# EAGLE board Board Laurien (EAGLE 5.12)
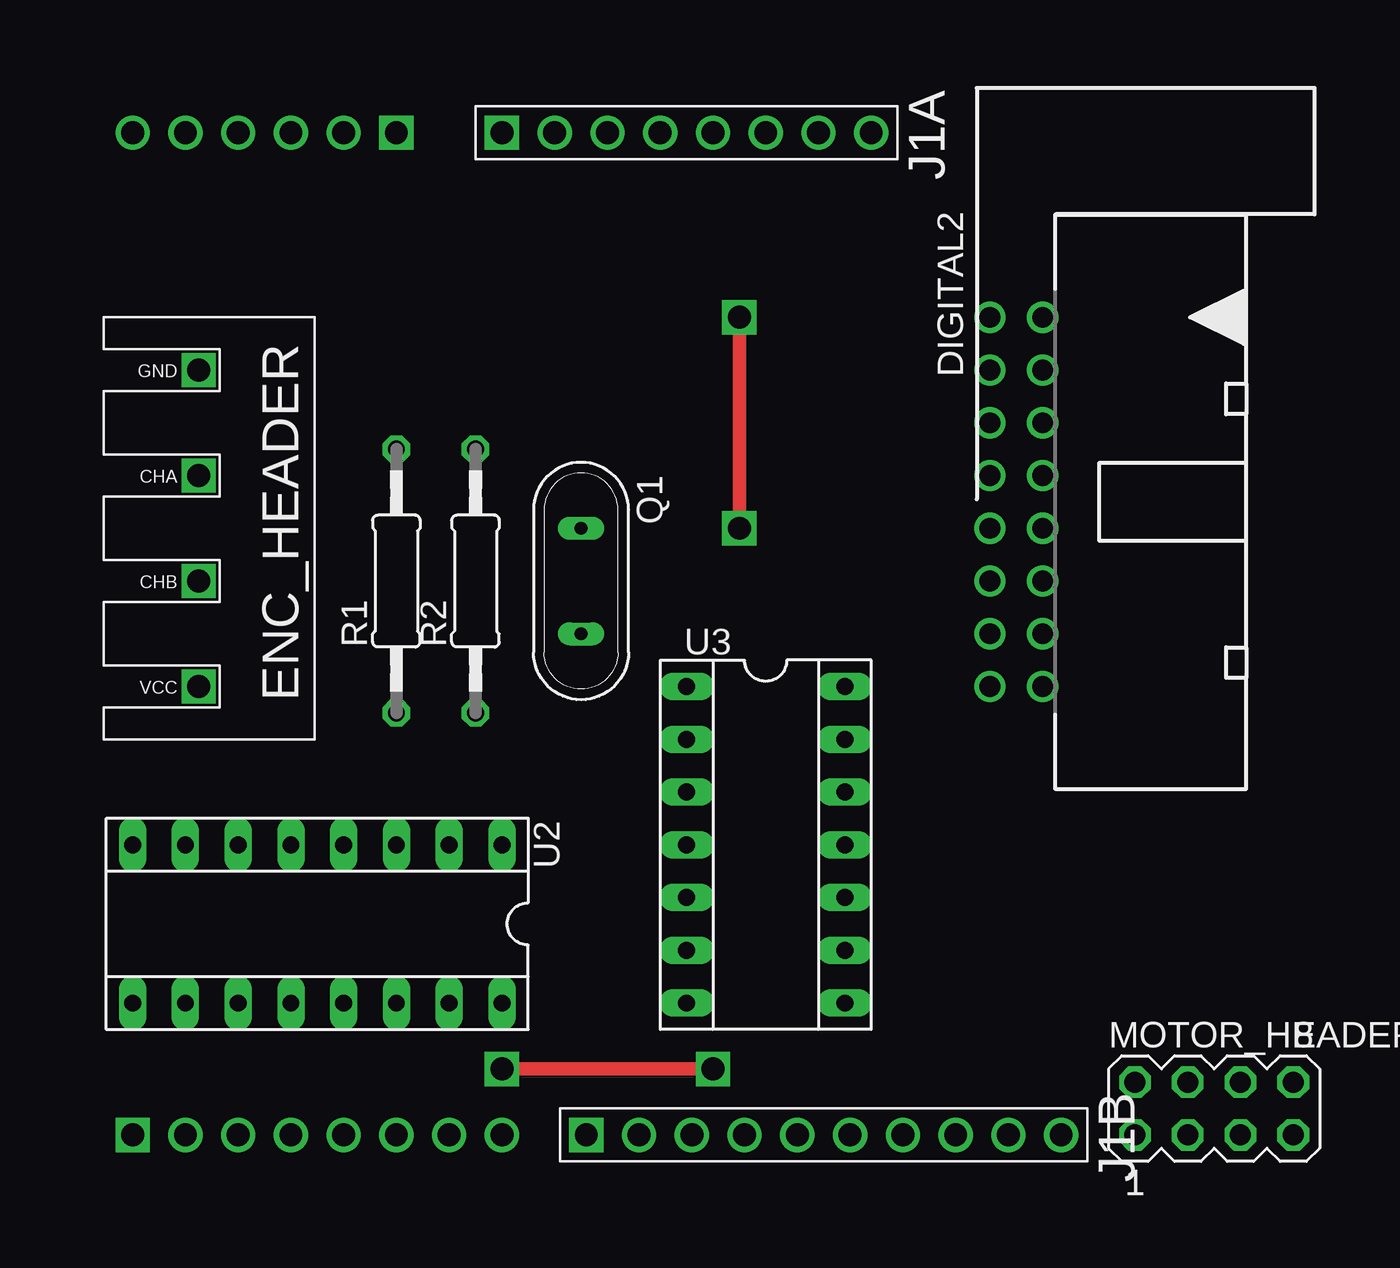
[diagram p0: board, top side]
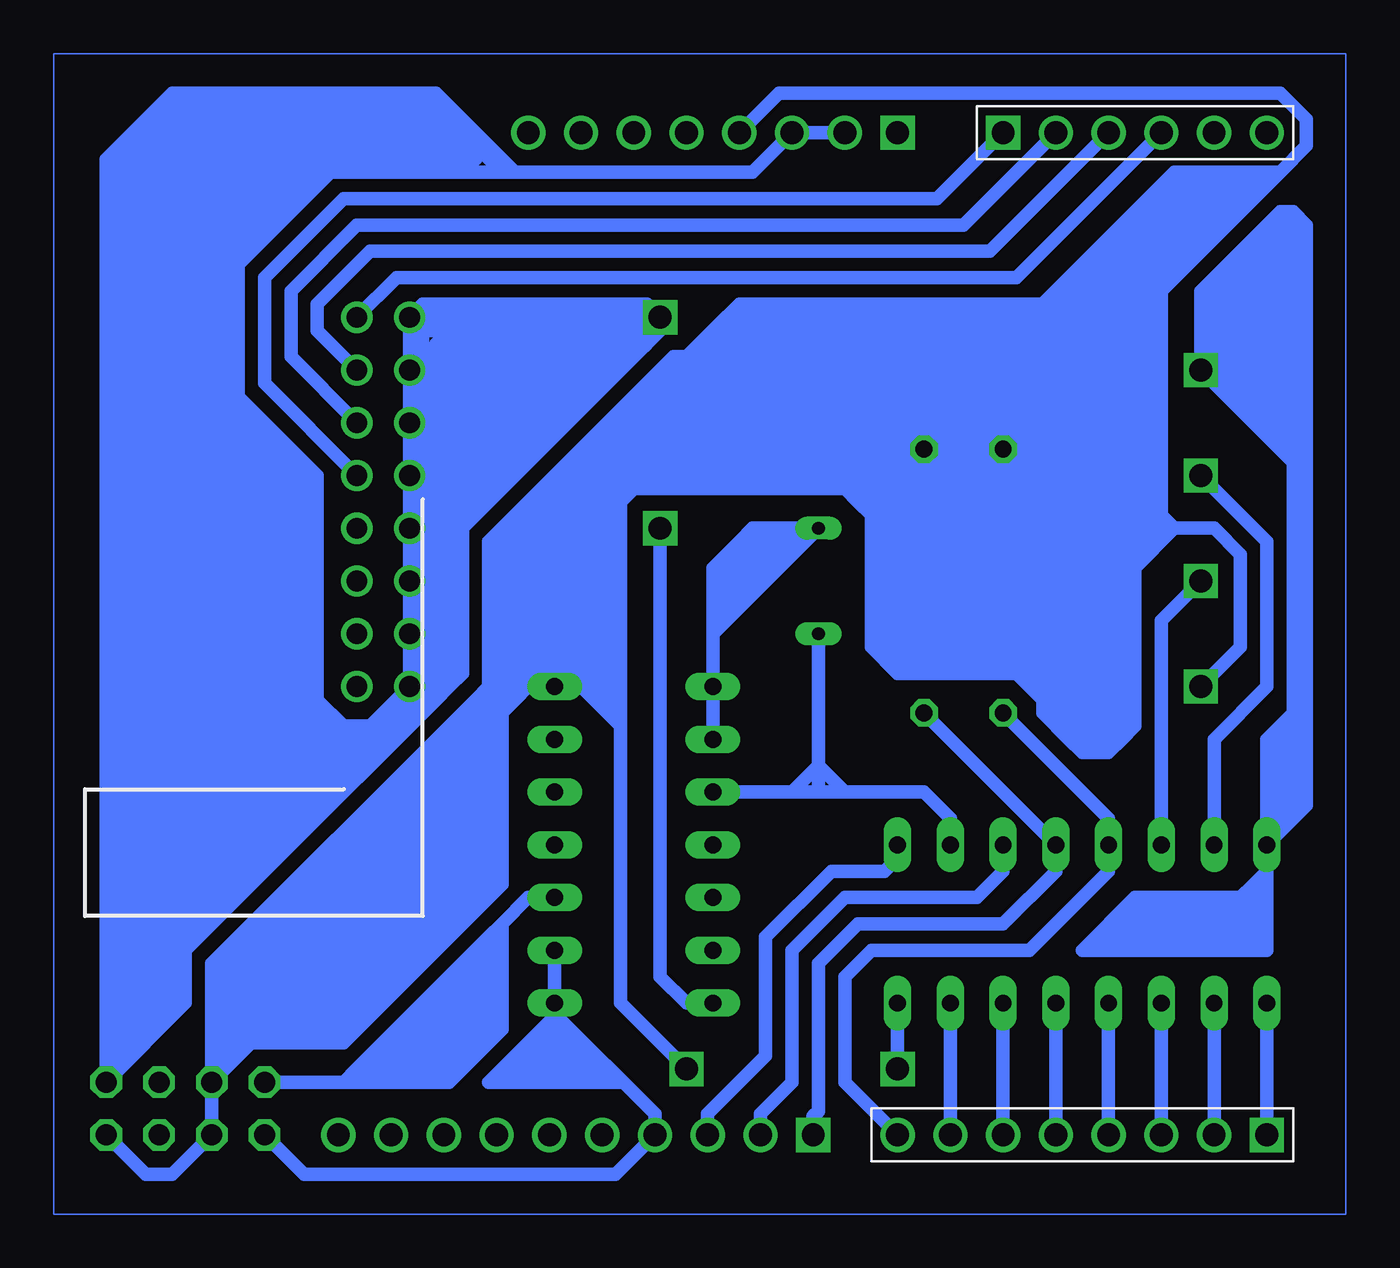
[diagram p1: board, bottom side, seen from below]

No outline drawn. Coordinates in mm, seen from the top.
Copper layers (1*16): Top 0.035mm / dielectric 1.5mm / Bottom 0.035mm
Design rules "default": minimum track width 10mil, minimum drill 24mil, track to track 8mil, track to pad 8mil, pad to pad 8mil, via to via 8mil, smd to smd 8mil, copper to edge 40mil, drill to drill 8mil, minimum pad ring 10mil, minimum via ring 8mil, stop-mask expansion 4mil, vias tented up to drill 0mil, thermal gap 10mil

## Footprints (pad centres in the part's own frame; a part is rotated, then mirrored left to right if it is on the bottom)
PAK100/2500-5-16 = drill 1 pad 1.422 round: 1 -8.89,-1.27; 2 -8.89,1.27; 3 -6.35,-1.27; 4 -6.35,1.27; 5 -3.81,-1.27; 6 -3.81,1.27; 7 -1.27,-1.27; 8 -1.27,1.27; 9 1.27,-1.27; 10 1.27,1.27; 11 3.81,-1.27; 12 3.81,1.27; 13 6.35,-1.27; 14 6.35,1.27; 15 8.89,-1.27; 16 8.89,1.27
MA04-2 = drill 1.016 octagon: 1 -3.81,-1.27; 2 -3.81,1.27; 3 -1.27,-1.27; 4 -1.27,1.27; 5 1.27,-1.27; 6 1.27,1.27; 7 3.81,-1.27; 8 3.81,1.27
QS = drill 0.61 long: 1 -2.54,0; 2 2.54,0
0207/12 = drill 0.813 octagon: 1 -6.35,0; 2 6.35,0
SOCKET-16 = drill 0.813 long: 1 -8.89,-3.81; 2 -6.35,-3.81; 3 -3.81,-3.81; 4 -1.27,-3.81; 5 1.27,-3.81; 6 3.81,-3.81; 7 6.35,-3.81; 8 8.89,-3.81; 9 8.89,3.81; 10 6.35,3.81; 11 3.81,3.81; 12 1.27,3.81; 13 -1.27,3.81; 14 -3.81,3.81; 15 -6.35,3.81; 16 -8.89,3.81
SOCKET-14 = drill 0.813 long: 1 -7.62,-3.81; 2 -5.08,-3.81; 3 -2.54,-3.81; 4 0,-3.81; 5 2.54,-3.81; 6 5.08,-3.81; 7 7.62,-3.81; 8 7.62,3.81; 9 5.08,3.81; 10 2.54,3.81; 11 0,3.81; 12 -2.54,3.81; 13 -5.08,3.81; 14 -7.62,3.81

## Placement (x,y rotation side)
DIGITAL2  [PAK100/2500-5-16]  46.35,34.29 270 top
MOTOR_HEADER  [MA04-2]  55.88,5.08 0 top
Q1  [QS]  25.4,30.48 270 top
R1  [0207/12]  16.51,30.48 90 top
R2  [0207/12]  20.32,30.48 90 top
U2  [SOCKET-16]  12.7,13.97 180 top
U3  [SOCKET-14]  34.29,17.78 270 top

## Library data of the parts
DIGITAL2 = con-3m
MOTOR_HEADER = con-lstb
Q1 = special
R1 R2 = rcl
U2 U3 = ic-package

## Nets
S$1: U2.7
S$2: Q1.1 U3.1 U3.2
S$4: U2.8 U3.7
S$6: U2.6
S$7: MOTOR_HEADER.3 MOTOR_HEADER.4 MOTOR_HEADER.7 R1.2 R2.2 U2.16 U3.14
S$8: R2.1 U2.4
S$10: DIGITAL2.6
S$12: MOTOR_HEADER.2 U3.10
S$15: MOTOR_HEADER.1 U3.8 U3.9
S$22: R1.1 U2.5
S$24: Q1.2 U2.2 U3.3
S$25: DIGITAL2.2
S$40: DIGITAL2.1 DIGITAL2.3 DIGITAL2.5 DIGITAL2.7 DIGITAL2.9 DIGITAL2.11 DIGITAL2.13 DIGITAL2.15 MOTOR_HEADER.8
S$44: U2.15
S$47: DIGITAL2.4
S$49: DIGITAL2.8
S$53: U2.1
S$54: U2.3
S$56: U2.14
S$57: U2.10
S$58: U2.11
S$59: U2.12
S$60: U2.13
S$61: U2.9

## Tracks (layer width: path | path; a pad name or v marks a point on that pad's centre or on a via)
S$1  (via drill 1.1)
  Bottom 0.66: U2.7 6.35,22.86 3.81,25.4 3.81,32.38 v6.99,35.56
S$2
  Bottom 0.66: U3.2 U3.1 | U3.1 30.48,27.94 26.04,32.38 | 26.04,32.38 Q1.1 28.57,33.02 29.21,32.38 | U3.1 30.48,28.57 | 30.48,29.84 30.48,31.11 | 26.04,32.38 26.67,32.38 | 26.67,32.38 29.21,32.38 | 29.21,32.38 30.48,31.11 | 30.48,31.11 29.84,31.11 | 29.84,31.11 29.21,31.75 28.57,31.75 | 28.57,31.75 27.3,31.75 | 27.3,31.75 26.67,32.38 | 27.3,31.75 27.94,31.11 | 27.94,31.11 30.48,28.57 | 30.48,28.57 30.48,29.21 | 30.48,29.21 30.48,29.84 | 30.48,29.84 28.57,31.75 | 28.57,31.75 27.94,31.11 | 27.94,31.11 28.57,31.11 29.84,29.84 | 29.84,31.11 29.84,29.84 | 29.84,29.84 30.48,29.21
S$3
  Bottom 0.66: 55.88,53.34 56.52,53.34 59.05,50.8 58.42,50.8 | 57.78,50.8 57.15,50.8 | 57.15,50.8 56.52,50.8 56.52,51.44 | 56.52,52.07 56.52,52.7 58.42,50.8 | 58.42,50.8 57.78,50.8 | 57.78,50.8 56.52,52.07 | 56.52,52.07 56.52,51.44 | 56.52,51.44 57.15,50.8
S$4  (via drill 1.1)
  Top 0.66: v33.02,33.02 v33.02,43.18
  Bottom 0.66: U3.7 31.75,10.16 33.02,11.43 v33.02,33.02 | 4.45,42.55 5.08,42.55 | 3.81,43.18 4.45,42.55 | 3.17,43.81 3.81,43.18 | 3.17,44.45 3.17,43.81 | 3.17,44.45 5.08,42.55 | 5.08,42.55 5.08,43.18 3.17,45.09 | 3.17,45.09 3.17,44.45 | 3.17,42.55 3.17,43.81 | 3.17,42.55 3.81,43.18 | 4.45,42.55 3.81,42.55 3.17,41.91 | 5.08,42.55 4.45,41.91 3.17,41.91 | 3.17,41.91 3.17,42.55 | 3.17,40.64 3.17,41.91 | 3.17,45.72 3.17,45.09 | 3.17,46.35 3.17,45.72 | 3.17,46.99 3.17,46.35 | 3.17,46.99 5.71,44.45 5.71,43.81 | 5.08,43.81 3.17,45.72 | 5.71,43.81 3.17,46.35 | 5.71,43.81 5.08,43.81 | 3.81,41.27 3.17,40.64 | 3.81,41.27 3.17,41.91 | 3.17,40.01 3.17,40.64 | 4.45,41.27 3.17,40.01 | 4.45,41.27 3.81,41.27 | 5.71,43.18 5.71,43.81 | 5.71,43.18 5.08,43.81 | 2.54,47.62 3.17,46.99 | 4.45,40.64 4.45,41.27 | 2.54,39.37 3.17,40.01 | 2.54,39.37 2.54,47.62 | 2.54,38.73 2.54,39.37 | 2.54,38.73 4.45,40.64 | 4.45,40.64 5.08,41.27 5.71,41.27 1.91,37.47 | 2.54,47.62 3.17,47.62 6.35,44.45 6.35,41.27 | 5.71,42.55 5.71,43.18 | 5.08,41.91 4.45,41.27 | 5.08,41.91 5.71,42.55 | 5.71,41.91 5.08,41.91 | 5.71,41.91 5.71,42.55 | 1.91,38.1 1.91,47.62 2.54,48.26 3.17,48.26 6.99,44.45 6.99,43.18 | 1.91,38.1 2.54,38.73 | 1.91,37.47 1.91,38.1 | 6.35,41.27 5.71,41.91 | 6.99,43.18 6.35,43.81 | 6.99,41.27 v6.99,40.64 2.54,36.2 2.54,24.13 | 6.99,41.27 6.99,43.18 | 6.99,41.27 6.35,41.27 | 1.91,36.83 6.35,41.27 | 1.91,36.83 1.91,37.47 | 1.91,36.2 1.91,36.83 | 1.91,36.2 6.99,41.27 | 2.54,24.13 2.54,19.68 3.17,19.05 3.17,23.5 | 3.17,23.5 2.54,24.13 | 1.91,24.77 1.91,36.2 | 1.91,24.77 2.54,24.13 | 1.91,24.77 1.91,19.68 U2.8 3.81,22.86 3.17,23.5
S$5
  Bottom 0.66: 3.81,13.97 3.81,12.7 4.45,12.7 | 4.45,12.7 11.43,12.7 | 12.06,12.7 12.7,12.7 10.16,15.24 5.08,15.24 | 5.08,15.24 4.45,15.88 | 4.45,15.88 3.81,16.51 3.81,15.24 | 3.81,15.24 5.08,15.24 | 5.08,15.24 4.45,14.61 | 4.45,14.61 3.81,13.97 | 3.81,14.61 3.81,15.24 | 3.81,15.24 4.45,15.88 | 4.45,15.88 4.45,15.24 3.81,14.61 | 3.81,14.61 3.81,13.97 | 3.81,13.97 4.45,13.34 | 4.45,13.34 4.45,12.7 | 4.45,13.34 4.45,13.97 5.08,13.97 | 5.08,13.97 5.71,14.61 | 5.71,14.61 4.45,14.61 | 5.71,14.61 10.16,14.61 11.43,13.34 | 11.43,13.34 12.06,12.7 | 12.06,12.7 11.43,12.7 | 11.43,12.7 10.16,13.97 5.08,13.97 | 5.08,13.97 4.45,13.34 | 4.45,13.34 11.43,13.34
S$6  (via drill 1.1)
  Bottom 0.66: v6.99,30.48 8.89,28.57 U2.6
S$7  (via drill 1.1)
  Top 0.66: v21.59,6.99 v31.75,6.99
  Bottom 0.66: v29.21,52.07 27.3,53.98 3.17,53.98 1.91,52.7 1.91,51.44 3.17,50.16 | 3.17,50.16 3.81,50.16 | 3.81,50.16 8.26,50.16 15.24,43.18 | 15.88,42.55 20.32,38.1 20.32,37.47 | 10.16,29.84 10.16,30.48 | 10.16,24.77 10.16,29.84 | 10.16,24.13 10.16,23.5 10.79,22.86 | 10.79,22.86 11.43,22.23 12.7,22.23 13.34,22.86 | 13.34,22.86 14.61,24.13 14.61,24.77 | 14.61,24.77 15.88,26.04 | 15.88,26.04 21.59,26.04 22.86,27.3 22.86,33.66 | v6.99,25.4 5.08,27.3 5.08,31.75 6.35,33.02 8.26,33.02 | 8.89,33.02 8.26,33.02 | 9.53,33.02 12.7,33.02 R1.2 17.14,36.83 | 8.26,33.02 10.16,31.11 | 22.86,33.66 22.86,34.29 R2.2 | 17.14,36.83 19.68,36.83 | 19.68,36.83 R2.2 | 12.7,32.38 17.14,36.83 | 10.79,30.48 12.7,32.38 | 10.16,30.48 10.79,30.48 | 10.16,30.48 10.16,31.75 | 10.16,31.75 8.89,33.02 | 8.89,33.02 9.53,33.02 | 10.16,32.38 9.53,33.02 | 10.79,31.75 10.16,32.38 | 11.43,32.38 10.16,32.38 | 11.43,32.38 12.06,32.38 | 12.7,32.38 12.06,32.38 | 12.06,32.38 10.79,31.11 10.16,31.75 | 10.16,31.75 10.79,31.75 | 11.43,32.38 10.79,31.75 | 11.43,32.38 11.43,31.75 10.16,30.48 | 10.16,29.84 10.79,30.48 | 13.34,22.86 10.79,22.86 | 13.34,23.5 13.34,22.86 | 13.97,24.13 14.61,24.77 | 13.34,24.77 14.61,24.77 | 13.34,24.77 12.7,24.77 | 12.06,24.77 12.7,24.77 | 11.43,24.77 12.06,24.77 | 10.79,24.77 11.43,24.77 | 10.16,24.77 10.16,24.13 | 10.16,24.13 10.79,23.5 12.06,23.5 | 12.7,23.5 13.34,23.5 | 13.34,23.5 13.97,24.13 | 13.34,24.77 13.97,24.13 | 13.34,24.13 13.34,24.77 | 13.34,24.13 12.7,24.77 | 12.7,24.77 12.7,24.13 12.06,24.77 | 12.06,24.77 12.06,24.13 | 11.43,24.77 12.06,24.13 | 11.43,24.77 11.43,24.13 10.79,24.13 10.16,24.77 | 10.79,24.77 10.16,24.77 | 12.06,23.5 10.79,24.77 | 12.06,23.5 12.7,23.5
  Bottom 0.66: 12.7,23.5 13.34,24.13 | 13.34,24.13 12.06,24.13 | 15.24,26.04 13.97,26.04 | 15.88,26.04 15.24,26.04 | 15.24,26.04 14.61,25.4 | 20.32,37.47 R2.2 | 3.17,50.16 6.35,46.99 | 6.35,46.99 6.99,46.99 | 7.62,46.99 8.26,46.99 8.89,46.35 | 8.89,46.35 12.7,42.55 | 8.89,46.35 8.89,45.72 | 8.89,45.72 8.89,44.45 | 8.89,44.45 8.89,33.66 8.26,33.02 | 3.81,50.16 4.45,49.53 | 4.45,49.53 6.35,47.62 8.26,47.62 8.26,48.26 | 8.26,48.9 8.26,49.53 | 8.26,49.53 7.62,49.53 | 7.62,49.53 6.35,49.53 | 5.08,49.53 5.71,48.9 | 5.71,48.9 6.35,48.26 7.62,48.26 | 7.62,48.9 7.62,49.53 | 5.08,49.53 4.45,49.53 | 5.08,49.53 6.35,49.53 | 6.35,49.53 6.99,48.9 | 6.99,48.9 5.71,48.9 | 6.99,48.9 7.62,48.9 | 7.62,48.9 7.62,48.26 | 8.26,49.53 13.97,43.81 | 13.97,43.81 20.32,37.47 | 20.32,37.47 19.68,37.47 8.26,48.9 | 8.26,48.9 8.26,48.26 | 8.26,48.26 19.68,36.83 | 7.62,48.26 17.14,38.73 | 22.86,33.66 23.5,34.29 | 6.35,46.99 8.89,44.45 | 9.53,44.45 6.99,46.99 | 6.99,46.99 7.62,46.99 | 7.62,46.99 8.89,45.72 | 41.91,24.77 41.27,25.4 41.27,26.04 | 41.91,24.77 42.55,24.13 | 42.55,24.13 54.61,12.06 54.61,8.26 | v21.59,6.99 U2.16 | v31.75,6.99 34.92,10.16 34.92,23.5 | 34.92,23.5 36.83,25.4 U3.14 | 39.37,27.94 38.1,26.67 38.1,26.04 | U3.14 38.1,26.04 | 39.37,25.4 U3.14 | 40.01,24.77 39.37,25.4 | 40.64,16.51 40.64,15.88 48.26,8.26 | 40.64,16.51 40.64,17.14 | 40.64,17.14 40.64,24.13 | MOTOR_HEADER.7 57.78,1.91 56.52,1.91 MOTOR_HEADER.3 MOTOR_HEADER.4 | 48.26,8.26 52.07,8.26 | MOTOR_HEADER.4 53.98,6.99 | 53.98,6.99 53.34,7.62 | 53.34,7.62 52.7,8.26 | 52.7,8.26 52.07,8.26 | 52.07,8.26 43.81,16.51 43.81,17.78 | 43.81,19.05 43.81,19.68 43.18,20.32 | 54.61,8.26 54.61,7.62 | 54.61,7.62 MOTOR_HEADER.4 | 52.7,8.26 53.98,8.26
  Bottom 0.66: 54.61,8.26 53.98,8.26 | 53.98,8.26 53.34,7.62 | 53.34,7.62 54.61,7.62 | 54.61,7.62 53.98,6.99 | 48.26,8.26 48.26,8.89 40.64,16.51 | 40.64,16.51 41.27,16.51 | 41.27,16.51 48.26,9.53 48.26,10.16 41.91,16.51 42.55,16.51 48.26,10.79 48.26,11.43 43.18,16.51 44.45,16.51 48.9,12.06 48.9,12.7 | 48.9,12.7 45.09,16.51 | 48.9,12.7 49.53,12.06 53.98,12.06 53.34,12.7 | 53.34,12.7 45.72,20.32 | 45.72,20.32 41.91,24.13 | 45.72,20.32 45.72,19.68 | 45.72,19.68 45.72,19.05 | 45.72,18.41 45.72,17.78 | 50.16,12.7 50.8,12.7 | 51.44,12.7 52.07,12.7 | 53.34,12.7 52.7,12.7 | 45.72,19.68 52.7,12.7 | 52.7,12.7 52.07,12.7 | 52.07,12.7 45.72,19.05 | 45.72,18.41 51.44,12.7 | 51.44,12.7 50.8,12.7 | 50.8,12.7 45.72,17.78 | 45.72,17.78 45.72,17.14 | 45.72,17.14 45.72,16.51 | 45.72,16.51 49.53,12.7 50.16,12.7 | 50.16,12.7 45.72,17.14 | 45.72,16.51 41.27,16.51 | 41.27,16.51 40.64,17.14 | 40.64,17.14 41.27,17.14 | 41.27,17.14 42.55,17.14 | 44.45,17.14 45.09,17.14 | 45.09,17.14 45.72,17.14 | 45.72,18.41 45.72,19.05 | 45.72,19.68 41.27,24.13 41.27,23.5 | 41.27,23.5 41.27,17.14 | 41.27,17.14 41.91,17.78 | 41.91,17.78 41.91,18.41 | 41.91,18.41 41.91,19.05 | 41.91,20.32 41.91,20.95 | 41.91,20.95 41.91,21.59 | 41.91,22.23 41.91,22.86 | 41.91,22.86 41.27,23.5 | 41.91,22.86 45.09,19.68 45.09,19.05 | 45.09,17.14 45.09,19.05 | 45.09,19.05 41.91,22.23 | 41.91,22.23 41.91,21.59 | 41.91,21.59 43.18,20.32 | 43.18,20.32 42.55,20.32 41.91,20.95 | 41.91,20.95 42.55,20.95 44.45,19.05 44.45,17.14 | 44.45,17.14 42.55,17.14 | 42.55,17.14 41.91,17.78 | 41.91,17.78 42.55,17.78 | 43.18,17.78 43.81,17.78 | 43.81,17.78 43.81,19.05 | 43.81,19.05 43.18,19.68 42.55,19.68 | 42.55,19.68 41.91,20.32 | 41.91,20.32 41.91,19.05
  Bottom 0.66: 41.91,19.05 42.55,18.41 | 42.55,18.41 42.55,19.68 | 42.55,19.68 43.18,19.05 43.18,17.78 | 43.18,17.78 42.55,17.78 | 42.55,17.78 41.91,18.41 | 41.91,18.41 42.55,18.41 | 42.55,18.41 43.18,17.78 | 34.92,23.5 34.92,24.13 | 34.92,24.13 34.92,24.77 | 34.92,24.77 34.92,32.38 | 34.92,32.38 34.92,34.29 25.4,43.81 | 41.27,26.04 41.27,26.67 | 41.27,26.67 41.27,27.3 | 41.27,27.94 41.27,28.57 | 41.27,29.21 41.27,32.38 32.38,41.27 31.75,41.27 29.21,43.81 25.4,43.81 | 42.55,24.13 40.64,24.13 | 40.64,24.13 40.01,24.77 | 40.01,24.77 41.27,24.77 | 41.91,24.77 41.27,24.77 | 41.27,24.77 40.64,25.4 | 39.37,25.4 40.64,25.4 | 40.64,25.4 41.27,26.04 | 41.27,26.04 40.64,26.04 | 38.1,26.04 40.64,26.04 | 40.64,26.04 41.27,26.67 | 41.27,26.67 40.64,26.67 | 40.01,26.67 38.73,26.67 | 38.73,26.67 39.37,27.3 | 39.37,27.3 41.27,29.21 | 41.27,29.21 41.27,28.57 | 41.27,28.57 40.01,27.3 40.64,27.3 41.27,27.94 | 41.27,27.94 41.27,27.3 | 41.27,27.3 40.64,26.67 | 40.64,26.67 40.01,26.67 | 40.01,26.67 39.37,27.3 | 38.73,26.67 38.1,26.04 | 34.92,24.13 36.83,26.04 | 36.83,26.04 38.1,26.04 | 36.83,26.04 36.2,26.04 | 36.2,26.04 35.56,26.04 35.56,25.4 | 35.56,25.4 34.92,24.77 | 35.56,25.4 36.2,26.04 | 13.97,43.81 25.4,43.81 | 15.88,43.18 27.94,43.18 | 28.57,43.18 29.21,43.18 | 29.21,43.18 29.84,43.18 40.64,32.38 40.64,31.75 29.21,43.18 | 29.21,43.18 29.21,42.55 | 29.21,42.55 39.37,32.38 | 39.37,32.38 40.01,31.75 35.56,31.75 | 35.56,31.75 34.92,32.38 | 34.92,32.38 38.73,32.38 | 39.37,32.38 38.73,32.38 | 38.73,32.38 38.1,33.02 | 37.47,33.66 36.83,34.29 | 36.83,34.29 27.94,43.18 | 27.94,43.18 28.57,43.18 | 28.57,43.18 29.21,42.55 | 29.21,42.55 27.94,42.55 | 27.3,42.55 15.88,42.55 | 15.88,42.55 15.24,43.18
  Bottom 0.66: 15.24,43.18 15.88,43.18 | 15.88,43.18 17.14,41.91 | 17.14,41.91 18.41,40.64 | 18.41,40.64 20.95,38.1 | 20.95,38.1 20.95,37.47 | 20.95,37.47 20.95,36.83 23.5,34.29 | 23.5,34.29 24.13,34.92 28.57,34.92 | 29.84,34.92 30.48,34.92 | 31.11,34.92 31.75,34.92 | 32.38,34.92 33.02,34.92 | 33.66,34.92 34.29,34.92 35.56,33.66 | 36.2,33.66 37.47,33.66 | 37.47,33.66 38.1,33.02 | 38.1,33.02 35.56,33.02 | 35.56,33.02 35.56,33.66 | 35.56,33.66 35.56,34.29 | 35.56,34.29 35.56,34.92 | 35.56,34.92 36.2,34.29 | 35.56,33.66 36.2,33.66 | 36.2,33.66 36.83,34.29 | 36.83,34.29 35.56,34.29 | 35.56,31.75 35.56,33.02 | 35.56,34.29 27.3,42.55 | 27.3,42.55 27.94,42.55 | 27.94,42.55 35.56,34.92 | 17.14,41.91 17.78,41.91 | 25.4,41.91 26.67,41.91 33.66,34.92 | 33.66,34.92 33.02,34.92 | 33.02,34.92 26.67,41.27 25.4,41.27 | 19.05,41.27 18.41,41.27 17.78,41.91 | 17.78,41.91 25.4,41.91 | 25.4,41.91 32.38,34.92 | 32.38,34.92 31.75,34.92 | 31.75,34.92 25.4,41.27 | 25.4,41.27 19.05,41.27 | 19.05,41.27 18.41,40.64 | 18.41,40.64 19.05,40.64 | 23.5,40.64 24.77,40.64 | 24.77,40.64 25.4,40.64 30.48,35.56 | 30.48,35.56 31.11,34.92 | 31.11,34.92 30.48,34.92 | 30.48,34.92 24.77,40.64 | 24.77,40.64 24.77,40.01 | 24.77,40.01 29.21,35.56 | 29.21,35.56 28.57,35.56 | 28.57,35.56 24.13,40.01 | 24.13,40.01 24.13,39.37 28.57,34.92 | 28.57,34.92 29.84,34.92 | 29.84,34.92 30.48,35.56 | 30.48,35.56 29.21,35.56 | 28.57,35.56 27.3,35.56 | 27.3,35.56 24.13,35.56 | 24.13,35.56 23.5,34.92 20.95,37.47 | 20.95,38.73 19.68,40.01 | 19.68,40.01 19.05,40.64 | 19.05,40.64 23.5,40.64 | 23.5,40.64 24.13,40.01 | 24.13,40.01 22.86,40.01 | 19.68,40.01 20.32,40.01 | 22.23,40.01 22.86,40.01 | 22.86,40.01 26.67,36.2 26.04,36.2 | 25.4,36.2 24.13,36.2
  Bottom 0.66: 24.13,36.2 23.5,35.56 | 20.95,38.73 20.95,39.37 | 20.32,40.01 22.23,40.01 | 22.23,40.01 26.04,36.2 | 26.04,36.2 25.4,36.2 | 25.4,36.2 24.77,36.83 | 24.77,36.83 22.23,39.37 | 22.23,39.37 21.59,39.37 | 21.59,39.37 20.95,39.37 | 20.95,39.37 20.32,40.01 | 20.95,39.37 21.59,38.73 | 24.13,36.2 24.77,36.83 | 24.77,36.83 24.13,36.83 21.59,39.37 | 22.23,39.37 23.5,39.37 24.77,40.64 | 24.77,40.01 24.77,38.1 27.3,35.56 | 24.13,35.56 23.5,35.56 | 23.5,35.56 20.95,38.1 | 20.95,38.1 20.95,38.73 | 20.95,38.73 21.59,38.73 | 21.59,38.73 24.13,36.2 | 24.13,36.2 24.13,35.56 | 24.13,35.56 20.95,38.73
S$8  (via drill 1.1)
  Bottom 0.66: v25.65,3.81 25.65,4.7 25.4,4.95 25.4,12.06 23.5,13.97 16.51,13.97 13.97,16.51 U2.4 R2.1
S$9
  Bottom 0.66: 38.1,9.53 41.27,6.35 40.64,6.35 | 40.01,6.35 39.37,6.35 | 38.73,6.35 37.47,6.35 | 37.47,6.35 36.83,6.35 | 36.2,6.35 35.56,6.35 | 34.92,6.35 35.56,6.35 | 35.56,6.35 38.1,8.89 40.64,6.35 | 40.64,6.35 40.01,6.35 | 40.01,6.35 38.1,8.26 36.2,6.35 | 36.2,6.35 36.83,6.35 | 36.83,6.35 38.1,7.62 39.37,6.35 | 39.37,6.35 38.73,6.35 | 38.73,6.35 38.1,6.99 37.47,6.35
S$10  (via drill 1.1)
  Bottom 0.66: DIGITAL2.6 50.8,41.27 50.8,44.45 47.62,47.62 18.41,47.62 v13.97,52.07
S$11  (via drill 1.1)
  other vias: 35.81,3.81
S$12
  Bottom 0.66: 40.64,13.97 39.37,15.24 U3.10 | 40.64,13.97 41.27,13.34 | 41.27,13.34 47.62,6.99 | 47.62,6.99 48.26,6.35 | MOTOR_HEADER.2 48.26,6.35 | 40.64,13.97 40.64,8.89 43.18,6.35 48.26,6.35 | 41.27,13.34 41.27,12.7 | 41.27,12.7 41.27,8.89 43.18,6.99 46.99,6.99 | 47.62,6.99 46.99,6.99 | 46.99,6.99 46.35,7.62 | 46.35,7.62 41.91,12.06 | 41.27,12.7 41.91,12.06 | 41.91,12.06 41.91,11.43 | 41.91,11.43 41.91,8.89 43.18,7.62 45.72,7.62 | 46.35,7.62 45.72,7.62 | 45.72,7.62 45.09,8.26 | 45.09,8.26 42.55,10.79 | 41.91,11.43 42.55,10.79 | 42.55,10.79 42.55,10.16 | 42.55,10.16 42.55,8.89 43.18,8.26 43.81,8.26 | 43.81,8.26 44.45,8.26 | 45.09,8.26 44.45,8.26 | 44.45,8.26 43.18,9.53 43.18,8.89 43.81,8.26 | 43.81,8.26 43.81,8.89 42.55,10.16
S$14
  Bottom 0.66: 13.34,32.38 15.88,34.92 15.88,34.29 | 15.88,34.29 15.88,33.66 15.24,33.66 15.88,34.29
S$15  (via drill 1.1)
  Bottom 0.66: MOTOR_HEADER.1 50.16,1.91 35.18,1.91 v33.27,3.81 33.27,4.83 38.1,9.65 U3.8 U3.9
S$19
  Bottom 0.66: 20.95,35.56 22.23,34.29 21.59,34.29 | 21.59,34.29 20.95,34.29 20.95,34.92 21.59,34.29
S$20
  Bottom 0.66: 22.23,27.94 22.23,27.3 | 21.59,26.67 22.23,27.3 | 21.59,27.3 22.23,27.3
S$22  (via drill 1.1)
  Bottom 0.66: v21.59,3.81 24.13,6.35 24.13,11.43 22.86,12.7 15.24,12.7 11.43,16.51 U2.5 11.43,19.05 R1.1
S$24
  Bottom 0.66: U2.2 19.05,19.05 20.32,20.32 24.13,20.32 | 25.4,20.32 24.13,20.32 | U3.3 26.67,20.32 | 26.67,20.32 25.4,20.32 | 25.4,20.32 25.4,21.59 | 25.4,21.59 Q1.2 | 24.13,20.32 25.4,21.59 | 25.4,21.59 26.67,20.32
S$25  (via drill 1.1)
  Bottom 0.66: DIGITAL2.2 45.72,45.09 15.88,45.09 v8.89,52.07
S$33
  Bottom 0.076: 0,55.88 62.23,55.88 62.23,0 0,0 0,55.88
S$34  (via drill 1.1)
  other vias: 39.37,52.07
S$35  (via drill 1.1)
  other vias: 36.83,52.07
S$36  (via drill 1.1)
  other vias: 34.29,52.07
S$37  (via drill 1.1)
  other vias: 31.75,52.07
S$40  (via drill 1.1)
  Bottom 0.66: v24.13,52.07 v26.67,52.07 28.57,50.16 40.01,50.16 | 48.9,50.16 44.45,50.16 | 44.45,50.16 40.64,50.16 | 40.64,50.16 40.01,50.16 | 48.9,50.16 49.53,50.16 | 48.9,50.16 53.34,45.72 53.34,39.37 49.53,35.56 | 49.53,24.13 49.53,23.5 48.9,23.5 | 49.53,24.77 49.53,35.56 | 48.26,23.5 48.9,23.5 | DIGITAL2.15 45.09,26.04 | 45.09,26.04 DIGITAL2.13 DIGITAL2.11 DIGITAL2.9 DIGITAL2.7 DIGITAL2.5 DIGITAL2.3 45.09,42.55 | DIGITAL2.15 46.99,23.5 | 40.01,50.16 43.81,53.98 44.45,53.98 | 44.45,53.98 56.52,53.98 59.69,50.8 59.69,9.53 | 59.69,8.26 59.69,6.99 | 59.69,6.99 MOTOR_HEADER.8 55.88,10.16 55.88,12.7 | 40.64,50.16 43.81,53.34 | 43.81,53.34 44.45,53.98 | 44.45,53.98 44.45,50.16 | 44.45,50.16 43.81,50.8 | 43.81,50.8 43.81,52.07 | 43.81,53.34 43.81,52.7 | 43.81,52.7 42.55,51.44 | 42.55,51.44 41.91,50.8 43.81,50.8 | 43.81,50.8 43.18,51.44 | 42.55,51.44 43.18,51.44 | 43.81,52.7 43.81,52.07 | 43.81,52.07 43.18,51.44 | 53.98,46.35 53.34,46.35 49.53,50.16 | 49.53,50.16 50.16,50.16 | 52.7,50.16 53.34,50.16 53.34,46.99 52.7,47.62 | 52.7,47.62 50.8,49.53 | 50.8,49.53 50.16,50.16 | 50.16,50.16 51.44,50.16 | 52.07,50.16 52.7,50.16 | 52.7,50.16 52.7,49.53 | 52.7,47.62 52.7,48.26 | 52.7,48.26 52.7,49.53 | 52.7,49.53 52.07,50.16 | 52.07,50.16 51.44,50.16 | 51.44,50.16 50.8,49.53 | 50.8,49.53 51.44,49.53 | 51.44,49.53 52.07,49.53 52.07,48.9 | 52.07,48.9 51.44,49.53 | 52.07,48.9 52.7,48.26 | 55.88,12.7 51.44,17.14 | 49.53,35.56 50.16,35.56 | 50.8,35.56 52.07,35.56 | 52.07,35.56 53.34,35.56 53.34,36.2 | 53.34,36.2 53.34,36.83 | 53.34,38.1 53.34,38.73 50.16,35.56 | 50.16,35.56 50.8,35.56 | 50.8,35.56 51.44,36.2 | 52.7,37.47 53.34,38.1 | 53.34,38.1 53.34,36.83 | 53.34,36.83 52.07,35.56
  Bottom 0.66: 52.07,35.56 51.44,36.2 | 51.44,36.2 52.7,37.47 | 52.7,37.47 52.7,36.83 52.07,36.2 53.34,36.2 | 59.69,6.99 59.05,7.62 | 59.05,7.62 56.52,10.16 57.15,10.16 | 58.42,10.16 59.05,10.16 59.69,9.53 | 59.69,9.53 59.69,8.89 | 59.69,8.26 59.05,7.62 | 59.05,7.62 59.05,8.26 57.15,10.16 | 57.15,10.16 57.78,10.16 | 57.78,10.16 58.42,10.16 | 58.42,10.16 59.69,8.89 | 59.69,8.89 59.69,8.26 | 59.69,8.26 57.78,10.16 | 55.88,12.7 55.88,13.34 | 55.88,13.97 55.88,14.61 | 55.88,15.24 55.88,15.88 | 55.88,16.51 55.88,17.14 55.24,17.14 | 55.24,17.14 54.61,17.14 | 53.98,17.14 53.34,17.14 | 52.7,17.14 52.07,17.14 55.88,13.34 | 55.88,13.34 55.88,13.97 | 55.88,13.97 52.7,17.14 | 52.7,17.14 53.34,17.14 | 53.34,17.14 55.88,14.61 | 55.88,14.61 55.88,15.24 | 55.88,15.24 53.98,17.14 | 53.98,17.14 54.61,17.14 | 54.61,17.14 55.88,15.88 | 55.88,15.88 55.88,16.51 | 55.88,16.51 55.24,17.14 | 51.44,17.14 51.44,17.78 50.8,18.41 | 50.8,18.41 50.16,19.05 | 50.16,19.05 51.44,19.05 52.07,18.41 50.8,18.41 | 50.16,19.05 44.45,24.77 45.09,24.77 49.53,20.32 49.53,20.95 46.99,23.5 | 46.99,23.5 47.62,23.5 | 47.62,23.5 48.26,22.86 | 48.9,22.23 49.53,21.59 49.53,22.23 | 49.53,22.23 49.53,22.86 48.9,23.5 | 48.9,23.5 48.26,22.86 | 49.53,22.23 48.9,22.23 | 48.9,22.23 48.26,22.86 | 48.26,22.86 48.9,22.86 49.53,22.23 | 47.62,23.5 48.26,23.5 | 48.26,23.5 49.53,24.77 | 49.53,24.77 49.53,24.13 | 49.53,24.13 48.9,23.5 | 51.44,17.14 43.81,24.77 | 43.81,24.77 43.18,25.4 | 43.18,25.4 42.55,26.04 | 42.55,26.04 42.55,33.02 | 42.55,33.66 33.66,41.91 | 42.55,26.04 43.81,26.04 | 45.09,26.04 43.81,26.04 | 43.81,26.04 43.18,25.4 | 43.18,25.4 DIGITAL2.15 | DIGITAL2.15 44.45,25.4 43.81,24.77 | 33.02,43.18 33.66,43.81 44.45,43.81 DIGITAL2.1 45.09,42.55
  Bottom 0.66: 42.55,33.66 42.55,33.02 | 42.55,33.02 33.66,41.91 | 33.66,41.91 33.02,42.55 | 33.02,42.55 33.02,43.18 | 33.02,43.18 44.45,43.18 45.09,42.55 | 45.09,42.55 44.45,41.91 44.45,42.55 41.91,42.55 | 41.91,42.55 40.64,42.55 | 38.73,42.55 38.1,42.55 | 37.47,42.55 36.83,42.55 | 36.83,42.55 36.2,42.55 | 35.56,42.55 34.92,42.55 | 34.29,42.55 33.66,42.55 | 33.02,42.55 33.66,42.55 | 33.66,42.55 42.55,33.66 | 42.55,33.66 42.55,34.29 34.29,42.55 | 34.29,42.55 34.92,42.55 | 34.92,42.55 42.55,34.92 42.55,35.56 35.56,42.55 | 35.56,42.55 36.2,42.55 | 36.2,42.55 42.55,36.2 42.55,36.83 | 36.83,42.55 42.55,36.83 | 42.55,36.83 42.55,37.47 37.47,42.55 | 37.47,42.55 38.1,42.55 | 38.1,42.55 42.55,38.1 42.55,38.73 38.73,42.55 | 38.73,42.55 39.37,42.55 | 39.37,42.55 40.01,42.55 | 40.01,42.55 43.18,39.37 42.55,39.37 39.37,42.55 | 40.01,42.55 40.64,42.55 | 40.64,42.55 41.27,41.91 | 41.91,41.27 42.55,40.64 42.55,41.91 | 42.55,41.91 41.91,42.55 | 41.91,42.55 41.27,41.91 | 41.27,41.91 41.91,41.27 | 41.91,41.27 42.55,41.91 | 42.55,41.91 41.91,41.91 | 42.55,41.91 43.81,41.91
S$41  (via drill 1.1)
  other vias: 21.59,52.07
S$42  (via drill 1.1)
  other vias: 43.43,3.81
S$43  (via drill 1.1)
  other vias: 40.89,3.81
S$44  (via drill 1.1)
  Bottom 0.66: U2.15 v19.05,3.81
S$45  (via drill 1.1)
  other vias: 6.35,52.07
S$47  (via drill 1.1)
  Bottom 0.66: v11.43,52.07 17.14,46.35 46.99,46.35 49.53,43.81 49.53,42.55 DIGITAL2.4
S$49  (via drill 1.1)
  Bottom 0.66: v16.51,52.07 19.68,48.9 48.26,48.9 52.07,45.09 52.07,40.01 DIGITAL2.8
S$50  (via drill 1.1)
  other vias: 38.35,3.81
S$53  (via drill 1.1)
  Bottom 0.66: v30.73,3.81 30.73,4.83 27.94,7.62 27.94,13.34 24.77,16.51 22.23,16.51 21.59,17.14 U2.1
S$54  (via drill 1.1)
  Bottom 0.66: v28.19,3.81 28.19,4.83 26.67,6.35 26.67,12.7 24.13,15.24 17.78,15.24 16.51,16.51 U2.3
S$56  (via drill 1.1)
  Bottom 0.66: U2.14 v16.51,3.81
S$57  (via drill 1.1)
  Bottom 0.66: U2.10 v6.35,3.81
S$58  (via drill 1.1)
  Bottom 0.66: U2.11 v8.89,3.81
S$59  (via drill 1.1)
  Bottom 0.66: U2.12 v11.43,3.81
S$60  (via drill 1.1)
  Bottom 0.66: U2.13 v13.97,3.81
S$61  (via drill 1.1)
  Bottom 0.66: v3.81,3.81 U2.9
S$62  (via drill 1.1)
  other vias: 3.81,52.07
S$64  (via drill 1.1)
  other vias: 45.97,3.81
S$65  (via drill 1.1)
  other vias: 48.51,3.81
(copper drawn outside any net)
  shapes: Bottom area x17

## Text on the board
tNames: J1A | ENC_HEADER | GND | CHA | CHB | VCC | J1B